# EAGLE board InkTime (EAGLE 9.7.0)
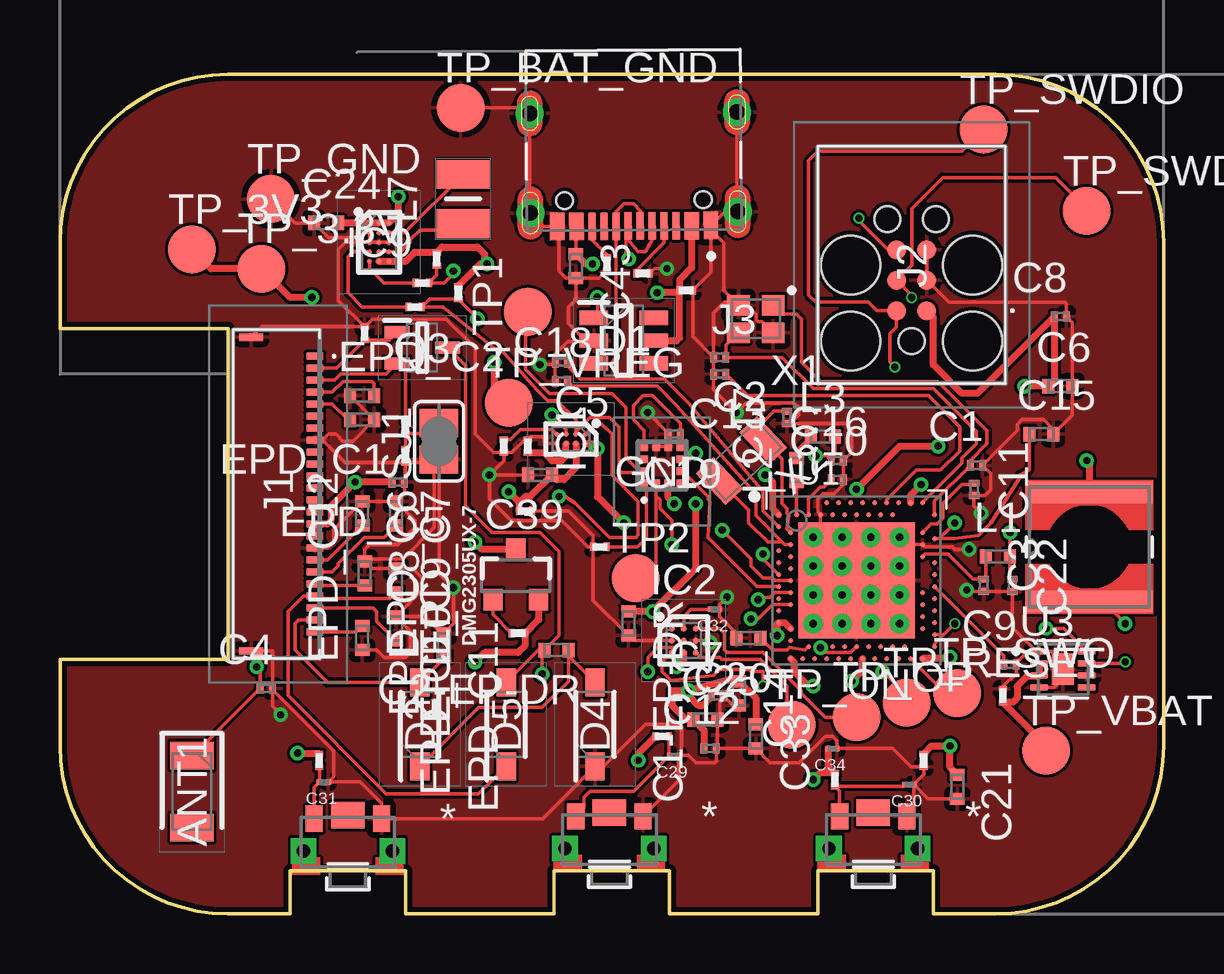
[diagram p0: board, top side]
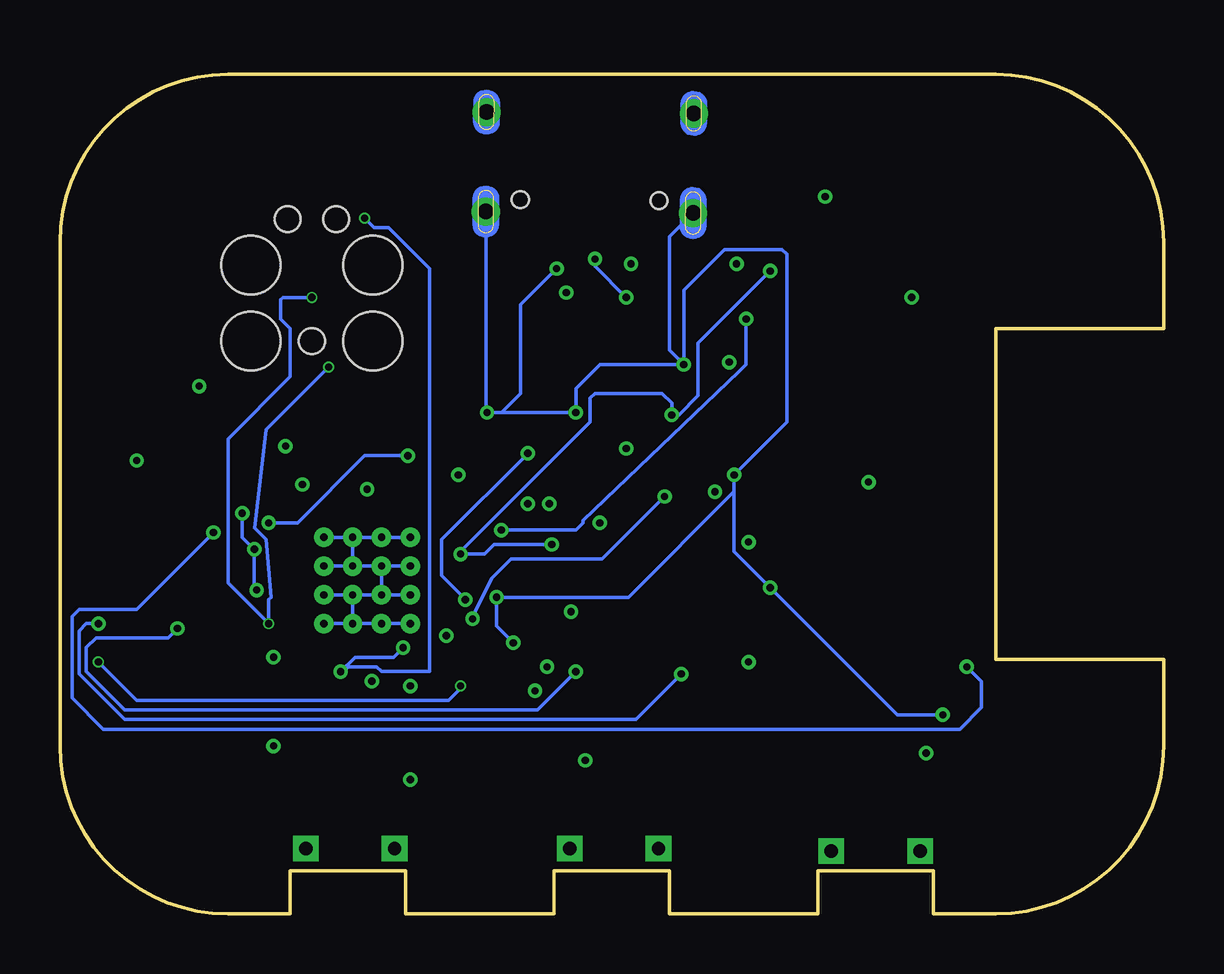
[diagram p1: board, bottom side, seen from below]

Size 46 x 35 mm. Coordinates in mm from the lower left corner, seen from the top.
Outline: 39,0 36.4,0 36.4,1.8 31.6,1.8 31.6,0 25.4,0 25.4,1.8 20.6,1.8 20.6,0 14.4,0 14.4,1.8 9.6,1.8 9.6,0 7,0 arc-90 0,7 0,10.6 7,10.6 7,24.4 0,24.4 0,28 arc-90 7,35 39,35 arc-90 46,28 46,7 arc-90 39,0
Copper layers (1+2*63+16): Top / GND / Bottom / layer 63
Stack-up 4 Layer Stack: Top SilkScreen Epoxy Ink / Top SolderMask User Defined 0.02mm Dk 4.3 / Top Surface Finish Lead-Free 0.02mm / Top User Defined 0.03mm / Dielectric-1 User Defined 0.034mm / Dielectric-2 User Defined 0.034mm / GND User Defined 0.03mm / Dielectric-3 User Defined 0.664mm / Power User Defined 0.03mm / Dielectric-4 User Defined 0.034mm / Dielectric-5 User Defined 0.034mm / Bottom User Defined 0.03mm / Bottom Surface Finish Lead-Free 0.02mm / Bottom SolderMask User Defined 0.02mm Dk 4.3 / Bottom SilkScreen Epoxy Ink
Design rules: minimum copper width 5mil, minimum drill size 0.2mm, copper clearance wire_polygon to wire_polygon 5mil, copper clearance wire_polygon to pad_smd 5mil, copper clearance wire_polygon to via 5mil, copper clearance pad_smd to pad_smd 5mil, copper clearance pad_smd to via 5mil, copper clearance via to via 5mil, copper clearance smd to pad (same net) 5mil, copper clearance smd to via (same net) 5mil, copper clearance smd to smd (same net) 5mil, dimension clearance 0.2mm, via restrict clearance 0mil, restrict clearance 0mil, drill distance 6mil, keepout clearance 0mil

## Footprints (pad centres in the part's own frame; a part is rotated, then mirrored left to right if it is on the bottom)
2450AT18B100E_ANTC3216X140N = smd 1.15 x 1.8: 1 -1.5,0; 2 1.5,0
NORDIC_NRF_3_RESC0201_L = smd 0.28 x 0.43: 1 -0.255,0; 2 0.255,0
NORDIC_NRF_3_RESC0402_L = smd 0.5 x 0.6: 1 -0.5,0; 2 0.5,0
GRM011R60J152KE01L_1_0201 = smd 0.35 x 0.25: 1 0,0.275; 2 0,-0.275
GRM011R60J152KE01L_2_CAPC0201X13N = smd 0.22 x 0.23: 1 -0.185,0; 2 0.185,0
ESP32_C6_LIBRARY_3_SOT95P280X145-6N = smd 1.2 x 0.6: 1 -1.25,0.95; 2 -1.25,0; 3 -1.25,-0.95; 4 1.25,-0.95; 5 1.25,0; 6 1.25,0.95
ESP32_C6_LIBRARY_5_SOD3716X135N = smd 1.15 x 0.8: 1 -1.75,0; 2 1.75,0
ESP32_C6_LIBRARY_4_ESP32_C6_LIBRARY_4_ESP32_C6_LIBRARY_4_ESP32_C6_LIBRARY_4_ESP32_WROVER_SPARKFUN-DISCRETESEMI_SOT23-3 = smd 0.8 x 0.9: 1 -0.95,-1; 2 0.95,-1; 3 0,1.1
BMA423_BMA423 = smd 0.3 x 0.35: 1 -0.75,-0.775; 2 -0.25,-0.775; 3 0.25,-0.775; 4 0.75,-0.775; 7 0.75,0.775; 8 0.25,0.775; 9 -0.25,0.775; 10 -0.75,0.775 | smd 0.35 x 0.3: 5 0.775,-0.25; 6 0.775,0.25; 11 -0.775,0.25; 12 -0.775,-0.25
BQ25180YBGR_BGA8C40P2X4_100X155X50 = smd 0.2 x 0.2: A1 -0.2,0.6; A2 0.2,0.6; B1 -0.2,0.2; B2 0.2,0.2; C1 -0.2,-0.2; C2 0.2,-0.2; D1 -0.2,-0.6; D2 0.2,-0.6
DRV2605YZFR_BGA9C50P3X3_144X144X62 = smd 0.25 x 0.25: A1 -0.5,0.5; A2 0,0.5; A3 0.5,0.5; B1 -0.5,0; B2 0,0; B3 0.5,0; C1 -0.5,-0.5; C2 0,-0.5; C3 0.5,-0.5
RT6160AWSC_BGA15C40P3X5_140X230X60 = smd 0.216 x 0.216: A1 -0.4,0.8; A2 0,0.8; A3 0.4,0.8; B1 -0.4,0.4; B2 0,0.4; B3 0.4,0.4; C1 -0.4,0; C2 0,0; C3 0.4,0; D1 -0.4,-0.4; D2 0,-0.4; D3 0.4,-0.4; E1 -0.4,-0.8; E2 0,-0.8; E3 0.4,-0.8
503480-2400_5034802400 = smd 0.3 x 0.7: 1 -5.75,1.525; 2 -5.25,1.525; 3 -4.75,1.525; 4 -4.25,1.525; 5 -3.75,1.525; 6 -3.25,1.525; 7 -2.75,1.525; 8 -2.25,1.525; 9 -1.75,1.525; 10 -1.25,1.525; 11 -0.75,1.525; 12 -0.25,1.525; 13 0.25,1.525; 14 0.75,1.525; 15 1.25,1.525; 16 1.75,1.525; 17 2.25,1.525; 18 2.75,1.525; 19 3.25,1.525; 20 3.75,1.525; 21 4.25,1.525; 22 4.75,1.525; 23 5.25,1.525; 24 5.75,1.525 | smd 0.3 x 1: MP1 -6.54,-1.125; MP2 6.54,-1.125
TC2030-IDC_TC2030IDC = smd 0.783 x 0.783: 1 -0.953,-0.635; 2 -0.953,0.635; 3 0.317,-0.635; 4 0.317,0.635; 5 1.588,-0.635; 6 1.588,0.635 | hole 2.451: -2.223,-2.54; -2.223,2.54; 0.952,-2.54; 0.952,2.54 | hole 1.067: -2.223,0; 2.857,-1.016; 2.857,1.016
KH-TYPE-C-16P_KINGHELM_KH-TYPE-C-16P = smd 0.6 x 1.15: A1_B12 -3.2,4.725; A4_B9 -2.4,4.725; A9_B4 2.4,4.725; A12_B1 3.2,4.725 | smd 0.3 x 1.15: A5 -1.25,4.725; A6 -0.25,4.725; A7 0.25,4.725; A8 1.25,4.725; B5 1.75,4.725; B6 0.75,4.725; B7 -0.75,4.725; B8 -1.75,4.725 | drill 0.65 pad 1.05: SH1 -4.32,0; SH2 4.32,0; SH3 -4.32,4.15; SH4 4.32,4.15 | hole 0.7: -2.89,3.65; 2.89,3.65
NORDIC_NRF_2_RESC0402_L = smd 0.5 x 0.6: 1 -0.5,0; 2 0.5,0
ESP32_C6_LIBRARY_2_IND_4828-WE-TPC_WRE = smd 0.9 x 5.3: 1 -2.286,0; 2 2.286,0
MLP2016SR47MT0S1_INDC2016X100N = smd 1.2 x 2.2: 1 -1.028,0; 2 1.028,0
ESP32_C6_LIBRARY_6_SOT65P210X110-3N = smd 1.05 x 0.5: 1 -1.05,0.65; 2 -1.05,-0.65; 3 1.05,0
CPF0201D7K68C1_0201 = smd 0.35 x 0.25: 1 0,0.275; 2 0,-0.275
ERA-1AEB3401C_0201 = smd 0.35 x 0.25: 1 0,0.275; 2 0,-0.275
ESP32_C6_LIBRARY_7_JUMPER_SJ = smd 1.168 x 1.6: 1 -0.762,0; 2 0.762,0
2025-10-22_07-23-44_LIBRARY_SW_EVP-AKE31A_PAN = smd 0.711 x 1.092: 1 -1.4,-0.972; 2 1.4,-0.972 | drill 0.559 pad 0.914 square: 3 -1.848,0.381; 4 1.848,0.381 | smd 1.397 x 1.092: 5 0,-1.124
HECTOR_WATCH_1_TP20R = smd 2 x 2: TP 0,0
NORDIC_NRF_4_AQFN50P700X700X85_HS-74N = smd 4.85 x 4.85: P$74 0,0 | drill 0.3 pad 0.6: P$75 -1.8,1.8; P$76 -0.6,1.8; P$77 0.6,1.8; P$78 1.8,1.8; P$79 -1.8,0.6; P$80 -0.6,0.6; P$81 0.6,0.6; P$82 1.8,0.6; P$83 -1.8,-0.6; P$84 -0.6,-0.6; P$85 0.6,-0.6; P$86 1.8,-0.6; P$87 -1.8,-1.8; P$88 -0.6,-1.8; P$89 0.6,-1.8; P$90 1.8,-1.8 | smd 0.2 x 0.2: P$A8 -1.25,3.25; P$A10 -0.75,3.25; P$A12 -0.25,3.25; P$A14 0.25,3.25; P$A16 0.75,3.25; P$A18 1.25,3.25; P$A20 1.75,3.25; P$A22 2.25,3.25; P$A23 2.75,3.25; P$AA24 3.25,-2.25; P$AB2 -2.75,-2.5; P$AC5 -2,-2.75; P$AC9 -1,-2.75; P$AC11 -0.5,-2.75; P$AC13 0,-2.75; P$AC15 0.5,-2.75; P$AC17 1,-2.75; P$AC19 1.5,-2.75; P$AC21 2,-2.75; P$AC24 3.25,-2.75; P$AD2 -2.75,-3.25; P$AD4 -2.25,-3.25; P$AD6 -1.75,-3.25; P$AD8 -1.25,-3.25; P$AD10 -0.75,-3.25; P$AD12 -0.25,-3.25; P$AD14 0.25,-3.25; P$AD16 0.75,-3.25; P$AD18 1.25,-3.25; P$AD20 1.75,-3.25; P$AD22 2.25,-3.25; P$AD23 2.75,-3.25; P$B1 -3.25,2.75; P$B3 -2.5,2.75; P$B5 -2,2.75; P$B7 -1.5,2.75; P$B9 -1,2.75; P$B11 -0.5,2.75; P$B13 0,2.75; P$B15 0.5,2.75; P$B17 1,2.75; P$B19 1.5,2.75; P$B24 3.25,2.75; P$C1 -3.25,2.25; P$D2 -2.75,2; P$D23 2.75,2; P$E24 3.25,1.75; P$F2 -2.75,1.5; P$F23 2.75,1.5; P$G1 -3.25,1.25; P$H2 -2.75,1; P$H23 2.75,1; P$J1 -3.25,0.75; P$J24 3.25,0.75; P$K2 -2.75,0.5; P$L1 -3.25,0.25; P$L24 3.25,0.25; P$M2 -2.75,0; P$N1 -3.25,-0.25; P$N24 3.25,-0.25; P$P2 -2.75,-0.5; P$P23 2.75,-0.5; P$R1 -3.25,-0.75; P$R24 3.25,-0.75; P$T2 -2.75,-1; P$T23 2.75,-1; P$U1 -3.25,-1.25; P$U24 3.25,-1.25; P$V23 2.75,-1.5; P$W1 -3.25,-1.75; P$W24 3.25,-1.75; P$Y2 -2.75,-2; P$Y23 2.75,-2
ESP32_C6_LIBRARY_SON50P200X200X80-9N = smd 0.76 x 0.27: 1 -0.985,0.75; 2 -0.985,0.25; 3 -0.985,-0.25; 4 -0.985,-0.75; 5 0.985,-0.75; 6 0.985,-0.25; 7 0.985,0.25; 8 0.985,0.75 | smd 0.9 x 1.3: 9 0,0
NORDIC_NRF_BT-XTAL_2016_N = smd 0.95 x 0.85: 1 -0.725,-0.575; 2 0.725,-0.575; 3 0.725,0.575; 4 -0.725,0.575
NORDIC_NRF_1_XTAL_3215_N = smd 1 x 1.8: 1 -1.25,0; 2 1.25,0

## Placement (x,y rotation side)
ANT1  2450AT18B100E_2450AT18B100E  [2450AT18B100E_ANTC3216X140N]  5.5,5.1 270 top
C1  12pF  [NORDIC_NRF_3_RESC0201_L]  38.2,18.7 0 top
C1-EP-DR  10uF  [NORDIC_NRF_3_RESC0402_L]  23.7,12.1 270 top
C2  12pF  [NORDIC_NRF_3_RESC0201_L]  27.5,23.2 180 top
C2-EP-DR  4.7uF/25V  [NORDIC_NRF_3_RESC0402_L]  20.7,11 180 top
C3  1pF  [NORDIC_NRF_3_RESC0201_L]  38.5,13.7 270 top
C4  1pF  [NORDIC_NRF_3_RESC0201_L]  8.6,9.4 0 top
C5  100nF  [NORDIC_NRF_3_RESC0201_L]  20.9,23 180 top
C6  4.7μF  [NORDIC_NRF_3_RESC0402_L]  41.7,22 0 top
C7  100nF  [NORDIC_NRF_3_RESC0201_L]  27.4,9.1 0 top
C8  100nF  [NORDIC_NRF_3_RESC0201_L]  41.7,24.9 0 top
C9  820pF  [NORDIC_NRF_3_RESC0201_L]  39.6,10.4 0 top
C10  N.C.  [NORDIC_NRF_3_RESC0201_L]  32.4,18.1 0 top
C11  100pF  [NORDIC_NRF_3_RESC0201_L]  38.1,17.7 270 top
C12  100nF  [NORDIC_NRF_3_RESC0201_L]  27.1,6.9 0 top
C13  N.C.  [NORDIC_NRF_3_RESC0201_L]  27.5,22.5 180 top
C14  4.7μF  [NORDIC_NRF_3_RESC0402_L]  28.3,9.2 270 top
C15  1.0μF  [NORDIC_NRF_3_RESC0402_L]  40.9,20 0 top
C16  47nF  [NORDIC_NRF_3_RESC0201_L]  32.4,18.9 0 top
C17  12pF  [NORDIC_NRF_3_RESC0201_L]  30.3,20.7 90 top
C18  12pF  [NORDIC_NRF_3_RESC0201_L]  20.9,22.2 0 top
C19  100nF  [NORDIC_NRF_3_RESC0201_L]  25.6,20 180 top
C20  4.7μF  [NORDIC_NRF_3_RESC0402_L]  28.7,11.5 180 top
C21  4.7μF  [NORDIC_NRF_3_RESC0402_L]  37.4,5.3 270 top
C22  N.C.  [NORDIC_NRF_3_RESC0201_L]  39.7,13.7 270 top
C23  0.1uF  [GRM011R60J152KE01L_1_0201]  19.4,16.8 90 top
C24  10uF  [NORDIC_NRF_3_RESC0402_L]  11.1,28.8 0 top
C25  22uF  [NORDIC_NRF_3_RESC0402_L]  26.9,8.1 0 top
C27  o.1uF  [GRM011R60J152KE01L_1_0201]  39.3,9.1 0 top
C29  1uF  [GRM011R60J152KE01L_2_CAPC0201X13N]  25.6,6.6 180 top
C30  1uF  [GRM011R60J152KE01L_2_CAPC0201X13N]  35.4,5.4 180 top
C31  1uF  [GRM011R60J152KE01L_2_CAPC0201X13N]  11,5.5 180 top
C32  1uF  [GRM011R60J152KE01L_2_CAPC0201X13N]  27.3,12.7 180 top
C33  22uF  [NORDIC_NRF_3_RESC0402_L]  29,7.4 270 top
C34  0.1uF  [GRM011R60J152KE01L_2_CAPC0201X13N]  32.2,6.9 180 top
C37  1uF  [GRM011R60J152KE01L_1_0201]  19.5,19.5 0 top
C38  1uF  [GRM011R60J152KE01L_1_0201]  36,6.4 180 top
C39  10uF  [NORDIC_NRF_3_RESC0402_L]  20,18.3 180 top
C42  0.1uF  [GRM011R60J152KE01L_1_0201]  26.1,26 90 top
C43  4.7uF  [NORDIC_NRF_3_RESC0402_L]  21.5,27 270 top
D1  USBLC6-2SC6Y  [ESP32_C6_LIBRARY_3_SOT95P280X145-6N]  23.5,23.9 0 top
D2  MBR0530  [ESP32_C6_LIBRARY_5_SOD3716X135N]  15,7.9 90 top
D4  MBR0530  [ESP32_C6_LIBRARY_5_SOD3716X135N]  22.3,7.9 90 top
D5  MBR0530  [ESP32_C6_LIBRARY_5_SOD3716X135N]  18.6,7.9 90 top
DMG2305UX-7  20V/4.2A/52mΩ/1.4W  [ESP32_C6_LIBRARY_4_ESP32_C6_LIBRARY_4_ESP32_C6_LIBRARY_4_ESP32_C6_LIBRARY_4_ESP32_WROVER_SPARKFUN-DISCRETESEMI_SOT23-3]  19,14.1 0 top
EPD_C1  1uF/50V  [NORDIC_NRF_3_RESC0402_L]  12.6,20.6 180 top
EPD_C2  1uF/50V  [NORDIC_NRF_3_RESC0402_L]  12.6,21.6 0 top
EPD_C5  0.1uF/50V  [NORDIC_NRF_3_RESC0201_L]  14.1,18 180 top
EPD_C6  1uF/50V  [NORDIC_NRF_3_RESC0402_L]  12.6,16.7 270 top
EPD_C7  1uF/50V  [NORDIC_NRF_3_RESC0402_L]  14,16.7 270 top
EPD_C8  1uF/50V  [NORDIC_NRF_3_RESC0402_L]  12.7,14.2 270 top
EPD_C9  1uF/50V  [NORDIC_NRF_3_RESC0402_L]  14,13.9 270 top
EPD_C10  1uF/50V  [NORDIC_NRF_3_RESC0402_L]  14,11.9 270 top
EPD_C11  1uF/50V  [NORDIC_NRF_3_RESC0402_L]  16,11.2 270 top
EPD_C12  1uF/50V  [NORDIC_NRF_3_RESC0402_L]  12.6,11.5 90 top
GND  BMA423  [BMA423_BMA423]  25.1,18.7 0 top
IC1  BQ25180YBGR_BQ25180YBGR  [BQ25180YBGR_BGA8C40P2X4_100X155X50]  21.3,19.8 270 top
IC2  DRV2605YZFR  [DRV2605YZFR_BGA9C50P3X3_144X144X62]  26,11.4 0 top
IC9  RT6160AWSC_RT6160AWSC  [RT6160AWSC_BGA15C40P3X5_140X230X60]  13.3,28 0 top
J1  503480-2400_503480-2400  [503480-2400_5034802400]  9.1,17.5 270 top
J2  TC2030-IDC_TC2030-IDC  [TC2030-IDC_TC2030IDC]  35.5,26.1 90 top
J3  KH-TYPE-C-16P_KH-TYPE-C-16P  [KH-TYPE-C-16P_KINGHELM_KH-TYPE-C-16P]  23.9,33.4 180.4 top
L1  3.9nH  [NORDIC_NRF_2_RESC0402_L]  39.1,14.9 0 top
L2  10μH  [NORDIC_NRF_2_RESC0402_L]  30.7,18.5 90 top
L3  15nH  [NORDIC_NRF_2_RESC0402_L]  31.8,19.9 0 top
L5  68uH  [ESP32_C6_LIBRARY_2_IND_4828-WE-TPC_WRE]  42.9,15.3 90 top
L7  FTC252012SR47MBCA  [MLP2016SR47MT0S1_INDC2016X100N]  16.8,29.8 270 top
Q3  SI1308EDL-T1-GE3  [ESP32_C6_LIBRARY_6_SOT65P210X110-3N]  15.1,23.6 0 top
R1_EP_DR  0.47  [CPF0201D7K68C1_0201]  14.4,20.3 180 top
R1_USB  5k1  [ERA-1AEB3401C_0201]  24.3,26.7 270 top
R2  0  [CPF0201D7K68C1_0201]  15.1,26.3 270 top
R2_EP_DR  10K  [CPF0201D7K68C1_0201]  12.7,24.2 0 top
R2_USB  5K1  [ERA-1AEB3401C_0201]  22.8,27.1 0 top
R3  0  [CPF0201D7K68C1_0201]  22.5,15.3 90 top
R4  0  [CPF0201D7K68C1_0201]  14.8,25.3 270 top
R5  10K  [ERA-1AEB3401C_0201]  32.3,5.6 180 top
R7  10K  [ERA-1AEB3401C_0201]  25.1,7.4 270 top
R8  10K  [ERA-1AEB3401C_0201]  10.8,6.4 180 top
R9  10K  [CPF0201D7K68C1_0201]  18.5,19.5 180 top
R17  3K3  [CPF0201D7K68C1_0201]  16.6,25.9 0 top
R18  3K3  [CPF0201D7K68C1_0201]  15.7,27.3 0 top
R_RWR_EPD  10K  [CPF0201D7K68C1_0201]  19.1,11.7 90 top
R_TYPE_SEL  2.2  [CPF0201D7K68C1_0201]  14.4,19.1 180 top
SJ1  [ESP32_C6_LIBRARY_7_JUMPER_SJ]  15.8,19.7 90 top
SW_DN  2025-10-22_07-23-44_LIBRARY_EVP-AKE31ASW_EVP-AKE31A_PAN  [2025-10-22_07-23-44_LIBRARY_SW_EVP-AKE31A_PAN]  22.9,3.1 180 top
SW_ENT  2025-10-22_07-23-44_LIBRARY_EVP-AKE31ASW_EVP-AKE31A_PAN  [2025-10-22_07-23-44_LIBRARY_SW_EVP-AKE31A_PAN]  12,3 180 top
SW_UP  2025-10-22_07-23-44_LIBRARY_EVP-AKE31ASW_EVP-AKE31A_PAN  [2025-10-22_07-23-44_LIBRARY_SW_EVP-AKE31A_PAN]  33.9,3.1 180 top
TP1  HECTOR_WATCH_1_TPTP20R  [HECTOR_WATCH_1_TP20R]  19.5,25.1 90 top
TP2  HECTOR_WATCH_1_TPTP20R  [HECTOR_WATCH_1_TP20R]  24,14 0 top
TP_3.3V  HECTOR_WATCH_1_TPTP20R  [HECTOR_WATCH_1_TP20R]  8.4,26.9 0 top
TP_3V3  HECTOR_WATCH_1_TPTP20R  [HECTOR_WATCH_1_TP20R]  5.5,27.7 0 top
TP_BAT_GND  HECTOR_WATCH_1_TPTP20R  [HECTOR_WATCH_1_TP20R]  16.7,33.6 0 top
TP_GND  HECTOR_WATCH_1_TPTP20R  [HECTOR_WATCH_1_TP20R]  8.8,29.8 0 top
TP_ON  HECTOR_WATCH_1_TPTP20R  [HECTOR_WATCH_1_TP20R]  30.5,7.9 0 top
TP_OP  HECTOR_WATCH_1_TPTP20R  [HECTOR_WATCH_1_TP20R]  33.2,8.2 0 top
TP_RESET  HECTOR_WATCH_1_TPTP20R  [HECTOR_WATCH_1_TP20R]  35.3,8.8 0 top
TP_SWDCLK  HECTOR_WATCH_1_TPTP20R  [HECTOR_WATCH_1_TP20R]  42.8,29.3 0 top
TP_SWDIO  HECTOR_WATCH_1_TPTP20R  [HECTOR_WATCH_1_TP20R]  38.5,32.7 0 top
TP_SWO  HECTOR_WATCH_1_TPTP20R  [HECTOR_WATCH_1_TP20R]  37.4,9.2 0 top
TP_VBAT  HECTOR_WATCH_1_TPTP20R  [HECTOR_WATCH_1_TP20R]  41.1,6.8 0 top
TP_VREG  HECTOR_WATCH_1_TPTP20R  [HECTOR_WATCH_1_TP20R]  18.7,21.3 0 top
U1  NORDIC_NRF_4_NRF52840_QF  [NORDIC_NRF_4_AQFN50P700X700X85_HS-74N]  33.2,13.9 0 top
U3  MAX17048G+T10  [ESP32_C6_LIBRARY_SON50P200X200X80-9N]  41.8,10.2 0 top
X1  32MHz  [NORDIC_NRF_BT-XTAL_2016_N]  29,24.8 180 top
X2  [NORDIC_NRF_1_XTAL_3215_N]  28.4,18.9 223.2 top

## Library data of the parts
ANT1 = InkTime_v5; ARROW_PART_NUMBER: 2450AT18B100E; ARROW_PRICE-STOCK: https://www.arrow.com/en/products/2450at18b100e/johanson-dielectrics?utm_currency=USD&region=nac; DESCRIPTION: Antennas 2.45GHz ANTENNA; HEIGHT: 1.4mm; MANUFACTURER_NAME: JOHANSON TECHNOLOGY; MANUFACTURER_PART_NUMBER: 2450AT18B100E; MOUSER_PART_NUMBER: 609-2450AT18B100E; MOUSER_PRICE-STOCK: https://www.mouser.co.uk/ProductDetail/Johanson-Technology/2450AT18B100E?qs=yCnrNFeXz%252Bh5MFsFIXGZGA%3D%3D
C1 C1-EP-DR C2 C2-EP-DR C3-C25 C27 C33 C37-C39 C42 C43 EPD_C1 EPD_C2 EPD_C5-EPD_C12 L1-L3 R1_EP_DR R1_USB R2 R2_EP_DR R2_USB R3-R5 R7-R9 R17 R18 R_RWR_EPD R_TYPE_SEL SJ1 TP1 TP2 TP_3.3V TP_3V3 TP_BAT_GND TP_GND TP_ON TP_OP TP_RESET TP_SWDCLK TP_SWDIO TP_SWO TP_VBAT TP_VREG U1 X1 X2 = InkTime_v5
C29-C32 C34 = InkTime_v5; AVAILABILITY: In Stock; CHECK_PRICES: https://www.snapeda.com/parts/GRM011R60J152KE01L/Murata/view-part/?ref=eda; DESCRIPTION: SMD Capacitor X5R(EIA) with Capacitance: 1500pF Tol. 10%. Rated Voltage: 6.3Vdc; MF: Murata; MP: GRM011R60J152KE01L; PACKAGE: 0201 Murata; PRICE: None; SNAPEDA_LINK: https://www.snapeda.com/parts/GRM011R60J152KE01L/Murata/view-part/?ref=snap
D1 = InkTime_v5; AVAILABILITY: In Stock; CHECK_PRICES: https://www.snapeda.com/parts/USBLC6-2SC6Y/STMicroelectronics/view-part/?ref=eda; DESCRIPTION: 17V Clamp 5A (8/20µs) Ipp Tvs Diode Surface Mount SOT-23-6; MF: STMicroelectronics; MP: USBLC6-2SC6Y; PACKAGE: SOT-23-6 STMicroelectronics; PRICE: None; SNAPEDA_LINK: https://www.snapeda.com/parts/USBLC6-2SC6Y/STMicroelectronics/view-part/?ref=snap
D2 D4 D5 = InkTime_v5; AVAILABILITY: In Stock; CHECK_PRICES: https://www.snapeda.com/parts/MBR0530/Onsemi/view-part/?ref=eda; DESCRIPTION: Diode Schottky 30 V 500mA Surface Mount SOD-123; MF: ON Semiconductor; MP: MBR0530; PACKAGE: SOD-123-2 ON Semiconductor; PRICE: None; PURCHASE-URL: https://www.snapeda.com/api/url_track_click_mouser/?unipart_id=179458&manufacturer=ON Semiconductor&part_name=MBR0530&search_term=None; SNAPEDA_LINK: https://www.snapeda.com/parts/MBR0530/Onsemi/view-part/?ref=snap
DMG2305UX-7 = InkTime_v5; PROD_ID: TRAN-14388
GND = InkTime_v5; ARROW_PART_NUMBER: BMA423; ARROW_PRICE-STOCK: https://www.arrow.com/en/products/bma423/bosch; DESCRIPTION: Accelerometers Triaxial low-g 12bit Acceleration Sensor; HEIGHT: 1mm; MANUFACTURER_NAME: BOSCH; MANUFACTURER_PART_NUMBER: BMA423; MOUSER_PART_NUMBER: 262-BMA423; MOUSER_PRICE-STOCK: https://www.mouser.co.uk/ProductDetail/Bosch-Sensortec/BMA423?qs=HXFqYaX1Q2xC%252BSgeGoX3mg%3D%3D
IC1 = InkTime_v5; ARROW_PART_NUMBER: BQ25180YBGR; ARROW_PRICE-STOCK: https://www.arrow.com/en/products/bq25180ybgr/texas-instruments?utm_currency=USD&region=nac; DESCRIPTION: Charger IC Lithium Ion/Polymer, Lithium Iron Phosphate 8-DSBGA (1.6x1.1); HEIGHT: 0.5mm; MANUFACTURER_NAME: Texas Instruments; MANUFACTURER_PART_NUMBER: BQ25180YBGR; MOUSER_PART_NUMBER: 595-BQ25180YBGR; MOUSER_PRICE-STOCK: https://www.mouser.co.uk/ProductDetail/Texas-Instruments/BQ25180YBGR?qs=doiCPypUmgEWjAK%252BJAX6Tw%3D%3D
IC2 = InkTime_v5; ARROW_PART_NUMBER: DRV2605YZFR; ARROW_PRICE-STOCK: https://www.arrow.com/en/products/drv2605yzfr/texas-instruments?region=nac; DESCRIPTION: Haptic Driver for ERM/LRA with Built-In Library and Smart Loop Architecture; HEIGHT: 0.625mm; MANUFACTURER_NAME: Texas Instruments; MANUFACTURER_PART_NUMBER: DRV2605YZFR
IC9 = InkTime_v5; DESCRIPTION: Buck-Boost Regulator Positive Output Step-Up/Step-Down I2C DC-DC Controller IC 15-WL-CSP (BSC) (1.4x2.3); HEIGHT: 0.6mm; MANUFACTURER_NAME: RICHTEK; MANUFACTURER_PART_NUMBER: RT6160AWSC; MOUSER_PART_NUMBER: 835-RT6160AWSC; MOUSER_PRICE-STOCK: https://www.mouser.co.uk/ProductDetail/Richtek/RT6160AWSC?qs=amGC7iS6iy%2FLd9PSoixZXQ%3D%3D
J1 = InkTime_v5; DESCRIPTION: FFC & FPC Connectors 0.5mm FPC RA SMT Dual Contact 24Ckt; HEIGHT: 1.87mm; MANUFACTURER_NAME: Molex; MANUFACTURER_PART_NUMBER: 503480-2400; MOUSER_PART_NUMBER: 538-503480-2400; MOUSER_PRICE-STOCK: https://www.mouser.co.uk/ProductDetail/Molex/503480-2400?qs=OAhjpuo3Vu7efIoxFh9AOw%3D%3D
J2 = InkTime_v5; DESCRIPTION: CABLE ADAPTER 6 POS; HEIGHT: 19mm; MANUFACTURER_NAME: Tag Connect; MANUFACTURER_PART_NUMBER: TC2030-IDC
J3 = InkTime_v5; AVAILABILITY: Not in stock; CHECK_PRICES: https://www.snapeda.com/parts/KH-TYPE-C-16P/Kinghelm/view-part/?ref=eda; MF: kinghelm; MP: KH-TYPE-C-16P; PACKAGE: None; PRICE: None; SNAPEDA_LINK: https://www.snapeda.com/parts/KH-TYPE-C-16P/Kinghelm/view-part/?ref=snap
L5 = InkTime_v5; COPYRIGHT: Copyright (C) 2024 Ultra Librarian. All rights reserved.; MANUFACTURER_PART_NUMBER: 744043680; MFR_NAME: Wurth Electronics
L7 = InkTime_v5; DESCRIPTION: SMD / SMT Inductors (Coils), L=0.47?H, L x W x T :; HEIGHT: 1mm; JLCPCB: https://jlcpcb.com/partdetail/6763488-FTC252012SR47MBCA/C5832368; MANUFACTURER_NAME: TDK; MANUFACTURER_PART_NUMBER: FTC252012SR47MBCA
Q3 = InkTime_v5; AVAILABILITY: In Stock; CHECK_PRICES: https://www.snapeda.com/parts/SI1308EDL-T1-GE3/Vishay+Siliconix/view-part/?ref=eda; DESCRIPTION: Si1308EDL-T1-GE3 N-channel MOSFET Transistor, 1.5 A, 30 V, 3-Pin SC-70 | Siliconix / Vishay SI1308EDL-T1-GE3; MF: Vishay Siliconix; MP: SI1308EDL-T1-GE3; PACKAGE: SOT-323 Vishay Semiconductor; PRICE: None; PURCHASE-URL: https://www.snapeda.com/api/url_track_click_mouser/?unipart_id=274603&manufacturer=Vishay Siliconix&part_name=SI1308EDL-T1-GE3&search_term=None; SNAPEDA_LINK: https://www.snapeda.com/parts/SI1308EDL-T1-GE3/Vishay+Siliconix/view-part/?ref=snap
SW_DN SW_ENT SW_UP = InkTime_v5; COPYRIGHT: Copyright (C) 2025 Ultra Librarian. All rights reserved.; DIGI-KEY_PART_NUMBER_1: P123437TR-ND; DIGI-KEY_PART_NUMBER_2: P123437CT-ND; DIGI-KEY_PART_NUMBER_3: P123437DKR-ND; MANUFACTURER_NAME: Panasonic; MANUFACTURER_PART_NUMBER: EVP-AKE31A
U3 = InkTime_v5; AVAILABILITY: In Stock; CHECK_PRICES: https://www.snapeda.com/parts/MAX17048G+T10/Analog+Devices/view-part/?ref=eda; DESCRIPTION: 3µA 1-Cell/2-Cell Fuel Gauge with ModelGauge; MF: Analog Devices; MP: MAX17048G+T10; PACKAGE: TDFN-8 Maxim; PRICE: None; PURCHASE-URL: https://www.snapeda.com/api/url_track_click_mouser/?unipart_id=329239&manufacturer=Analog Devices&part_name=MAX17048G+T10&search_term=None; SNAPEDA_LINK: https://www.snapeda.com/parts/MAX17048G+T10/Analog+Devices/view-part/?ref=snap

## Nets
3V3/1.7D: C34.2 DMG2305UX-7.2 IC2.C2 R5.2 R7.2 R8.2 R_RWR_EPD.2
3V3/2.4A: C6.1 C7.1 C8.1 C12.1 C14.1 C25.1 C33.1 GND.3 IC9.E2 IC9.E3 J2.1 R17.1 R18.1 TP_3.3V.TP TP_3V3.TP U1.P$A22 U1.P$AD14 U1.P$AD23 U1.P$B1 U1.P$W1 U1.P$Y2
ALERT/1.6C: U3.5
ALERT/2.5C: U1.P$J24
D+/1.5D: D1.4
D+/2.7D: U1.P$AD6
D-/1.5D: D1.6
D-/2.7D: U1.P$AD4
DEC1: C5.1 U1.P$C1
DN: D1.1 J3.A7 J3.B7
DP: D1.3 J3.A6 J3.B6
EPD_3V3: C1-EP-DR.1 DMG2305UX-7.3 EPD_C5.2 J1.15 J1.16 L5.2
EPD_BUSY/1.5D: J1.9
EPD_BUSY/2.2D: U1.P$AD12
EPD_CS/1.4C: J1.12
EPD_CS/2.2D: U1.P$K2
EPD_DC/1.5D: J1.11
EPD_DC/2.2D: U1.P$AD10
EPD_RST/1.5D: J1.10
EPD_RST/2.2D: U1.P$AC11
GDR: J1.2 Q3.1 R2_EP_DR.2
GND: C1-EP-DR.2 C1.2 C2.2 C3.2 C4.2 C5.2 C6.2 C7.2 C8.2 C9.2 C10.2 C11.2 C12.2 C13.2 C14.2 C15.2 C16.2 C17.1 C18.1 C19.2 C20.2 C21.2 C22.2 C23.2 C24.1 C25.2 C27.1 C29.1 C30.1 C31.1 C32.1 C33.2 C34.1 C37.1 C38.1 C39.2 C42.2 C43.2 D1.2 D4.1 EPD_C1.1 EPD_C2.1 EPD_C5.1 EPD_C6.1 EPD_C7.1 EPD_C8.1 EPD_C9.1 EPD_C10.1 EPD_C11.1 EPD_C12.1 GND.8 GND.9 IC1.D2 IC2.B1 IC2.B3 IC9.B1 IC9.C1 IC9.C2 IC9.C3 J1.8 J1.17 J1.MP1 J1.MP2 J2.3 J2.5 J3.A1_B12 J3.A12_B1 J3.SH1 J3.SH2 J3.SH3 J3.SH4 R1_USB.1 R2_EP_DR.1 R2_USB.2 R3.1 R9.1 R_TYPE_SEL.1 SJ1.1 SW_DN.1 SW_ENT.1 SW_UP.1 TP_BAT_GND.TP TP_GND.TP U1.P$74 U1.P$75 U1.P$76 U1.P$77 U1.P$78 U1.P$79 U1.P$80 U1.P$81 U1.P$82 U1.P$83 U1.P$84 U1.P$85 U1.P$86 U1.P$87 U1.P$88 U1.P$89 U1.P$90 U1.P$B7 U1.P$F23 U3.1 U3.4 U3.6 U3.9 X1.2 X1.4
HAPTIC_EN/1.4C: IC2.A1
HAPTIC_EN/2.6A: U1.P$U1
IMU_INT1: GND.5 U1.P$N1
IMU_INT2: GND.6 U1.P$P2
LX1: IC9.B2 IC9.B3 L7.1
LX2: IC9.D2 IC9.D3 L7.2
MOSI/1.5B: J1.14
MOSI/2.2D: U1.P$B13
N$1: C17.2 U1.P$D2 X2.1
N$2: C18.2 U1.P$F2 X2.2
N$4: L2.2 L3.1
N$5: L2.1 U1.P$B3
N$6: C10.1 C15.1 C16.1 L3.2 U1.P$B5 U1.P$E24
N$7: C13.1 U1.P$A18
N$8: C11.1 U1.P$D23
N$9: C1.1 U1.P$B24 X1.1
N$11: C2.1 U1.P$A23 X1.3
N$12: C9.1 U1.P$N24
N$13: IC1.D1 R9.2
N$14: C3.1 L1.1 U1.P$H23
N$15: ANT1.1 C4.1 C22.1 L1.2
N$16: C20.1 U1.P$AC5
N$20: C19.1 GND.7 GND.10
N$21: GND.1 R3.2
N$22: R1_EP_DR.1 R_TYPE_SEL.2 SJ1.2
N$23: IC9.E1 R2.2
N$24: J3.B5 R2_USB.1
N$26: IC9.D1 R4.2
N$28: C2-EP-DR.2 D5.2 L5.1 Q3.3
N$29: C2-EP-DR.1 D2.1 D4.2
N$30: C32.2 IC2.A2
N$31: EPD_C2.2 J1.4
N$32: EPD_C1.2 J1.5
N$34: EPD_C6.2 J1.18
N$35: EPD_C7.2 J1.19
N$36: EPD_C8.2 J1.20
N$37: J3.A5 R1_USB.2
N$38: EPD_C10.2 J1.22
N$40: EPD_C12.2 J1.24
OUT+: IC2.A3 TP_OP.TP
OUT-: IC2.C3 TP_ON.TP
P0.04: U1.P$J1
P0.09: U1.P$L24
P0.13/1.5D: C30.2 R5.1 SW_UP.2
P0.13/2.6C: U1.P$AD8
P0.14/1.5D: C31.2 R8.1 SW_ENT.2
P0.14/2.7C: U1.P$AC9
P0.19: U1.P$AC15
P0.20: U1.P$AD16
P0.21: U1.P$AC17
P0.22: U1.P$AD18
P0.23: U1.P$AC19
P0.24: U1.P$AD20
P0.25: U1.P$AC21
P0.26: U1.P$G1
P0.27: U1.P$H2
P0.28: U1.P$B11
P0.29: U1.P$A10
P0.30: U1.P$B9
P0.31: U1.P$A8
P1.01/1.6C: DMG2305UX-7.1 R_RWR_EPD.1
P1.01/2.4B: U1.P$Y23
P1.02/1.6C: C29.2 R7.1 SW_DN.2
P1.02/2.8C: U1.P$W24
P1.03: U1.P$V23
P1.04: U1.P$U24
P1.05: U1.P$T23
P1.06: U1.P$R24
P1.07: U1.P$P23
P1.09: U1.P$R1
P1.10: U1.P$A20
P1.11: U1.P$B19
P1.12: U1.P$B17
P1.13: U1.P$A16
P1.14: U1.P$B15
P1.15: U1.P$A14
PMIC_INT: IC1.A1 U1.P$T2
PREVGH: D5.1 EPD_C9.2 J1.21
PREVGL: D2.2 EPD_C11.2 J1.23
RESE: J1.3 Q3.2 R1_EP_DR.2
RESET: J2.6 TP_RESET.TP U1.P$AC13
SCK/1.5B: J1.13
SCK/2.2D: U1.P$A12
SCL/1.4C: IC2.C1 U3.7
SCL/2.4C: GND.12 IC1.B1 R4.1 R17.2 TP1.TP U1.P$M2
SDA/1.4C: IC2.B2 U3.8
SDA/2.4C: GND.2 IC1.C1 R2.1 R18.2 TP2.TP U1.P$L1
SWDCLK: J2.2 J2.4 TP_SWDCLK.TP TP_SWDIO.TP U1.P$AA24 U1.P$AC24
SWO: TP_SWO.TP U1.P$AD22
VBAT/1.2A: C27.2 TP_VBAT.TP U3.2 U3.3
VBAT/2.5C: C37.2 IC1.C2
VBUS/1.5D: C42.1 C43.1 D1.5 J3.A4_B9 J3.A9_B4
VBUS/2.6D: C21.1 C38.2 IC1.A2 U1.P$AD2
VREG: C23.1 C24.2 C39.1 IC1.B2 IC9.A1 IC9.A2 IC9.A3 TP_VREG.TP

## Tracks (layer width: path | path; a pad name or v marks a point on that pad's centre or on a via)
3V3/1.7D  (via drill 0.3 pad 0.6)
  Top 0.3: C34.2 32.02,6.16 R5.2 31.68,5.88 v31.4,5.6 | DMG2305UX-7.2 19.95,12.28 R_RWR_EPD.2 19.38,11.18 19.1,10.9 17.7,10.9 v17.3,10.5 | R7.2 24.1,6.68 v24.1,6.4 | R8.2 9.93,6.68 v9.9,6.7 | v25.7,10.3 26,10.6 IC2.C2
  Power 0.3: v31.4,5.6 24.9,5.6 v24.1,6.4 23.7,6.8 23.7,7.7 25.7,9.7 v25.7,10.3 25.4,10.3 24.6,11.1 24.2,11.1 22.2,9.1 18.7,9.1 v17.3,10.5 13.7,10.5 v9.9,6.7
3V3/2.4A  (via drill 0.3 pad 0.6)
  Top 0.3: v40.2,22 C6.1 41.45,22.25 C8.1 38.24,21.7 37.6,21.7 36.4,22.9 36.4,24.88 J2.1 | v35.9,17.9 35.45,17.45 U1.P$A22 | v29.4,18.3 29.7,18 29.7,16.9 U1.P$B1 | v25.6,17.1 25.35,17.35 GND.3 | R17.1 17.52,27.1 17.7,27.1 | 17.7,27.1 v17.8,27.1 | 17.7,27.1 17.7,27.5 17.4,27.8 15.93,27.8 R18.1 14.78,27.57 14.4,27.2 IC9.E3 IC9.E2 | v26.2,9.3 27.91,9.75 28.25,9.75 C14.1 29,9 C33.1 | v26.2,9.3 25.5,9.3 25.5,8.7 26.1,8.1 C25.1 26.84,7.65 C12.1 | v26.2,9.3 26.2,9.1 26.6,8.7 26.8,8.7 27.14,9.04 C7.1 | v10.5,25.7 9.6,25.7 TP_3.3V.TP 6.3,26.9 TP_3V3.TP | v29.9,11.6 29.9,12.1 U1.P$W1 30.2,12.15 U1.P$Y2 | v33,9.7 33.45,10.15 U1.P$AD14 | v37.1,10.7 37.05,10.65 U1.P$AD23
  Power 0.3: v40.2,22 38.2,22 35.9,19.7 v35.9,17.9 35.4,18.4 29.5,18.4 v29.4,18.3 26.8,18.3 v25.6,17.1 | v10.5,25.7 10.6,25.8 10.6,27.8 13.7,30.9 15,30.9 17.9,28 17.9,27.2 v17.8,27.1 23.6,21.3 23.6,18 24.5,17.1 v25.6,17.1 | v25.6,17.1 27,15.7 27,13.1 28.8,11.3 29.6,11.3 v29.9,11.6 30.3,11.6 32.2,9.7 v33,9.7 33.6,9.7 33.9,9.4 35.8,9.4 v37.1,10.7 | v26.2,9.3 26.3,9.4 26.3,9.9 26.6,10.2 26.28,12.2 26,12.2 24.8,13.5 24.5,13.8 24.2,13.8 22.8,15.2 22.8,16.7 23.1,17 23.9,17 24.6,16.3 24.8,16.3 v25.6,17.1
DEC1
  Top 0.152: C5.1 21.16,22.84 21.7,22.3 25.2,22.3 26.2,21.3 29.3,17.6 29.3,16.8 U1.P$C1
DN  (via drill 0.3 pad 0.6)
  Top 0.152: v23.7,27.3 23.6,27.4 23.6,28.59 J3.A7 23.68,28.12 24.1,27.6 24.4,27.6 24.68,28.08 J3.B7 | v22.4,25.7 22.4,25 D1.1
  Bottom 0.15: v23.7,27.3 23.7,27 v22.4,25.7
DP
  Top 0.152: D1.3 22.95,22.95 23.18,23.18 J3.B6 23.18,29.28 23.5,29.6 23.9,29.6 24.2,29.3 24.2,28.69 J3.A6
EPD_3V3  (via drill 0.3 pad 0.6)
  Top 0.3: C1-EP-DR.1 v24.7,12.6 26.5,14.4 v26.5,17.1 | DMG2305UX-7.3 17.6,15.2 v17.3,15.5 | EPD_C5.2 v12.3,18 11.3,17 11.3,16.4 11.15,16.25 J1.15 J1.16 | v42.8,18.9 42.9,18.8 L5.2 | v33.2,17.7 35,19.5 v36.6,19.5
  Power 0.3: v12.3,18 14.8,15.5 v17.3,15.5 17.1,15.3 17.1,14 19.7,11.4 23.5,11.4 v24.7,12.6 | v26.5,17.1 32.6,17.1 v33.2,17.7 | v36.6,19.5 42.2,19.5 v42.8,18.9
GDR
  Top 0.152: Q3.1 13.72,23.93 R2_EP_DR.2 11.53,22.75 J1.2
GND  (via drill 0.3 pad 0.6)
  Top 0.15: EPD_C8.1 13,14.4 EPD_C9.1 14.7,14.4 15.1,14 15.1,13.5 EPD_C10.1 14.1,12.3 | EPD_C8.1 12.8,14.7 12.9,14.8 14.3,14.8 15.6,16.1 15.6,18.82 | C4.2 8.86,10.96 J1.MP2 | SW_ENT.1 13.4,4.6 12.5,5.5 C31.1 11.4,5.71 11.4,6.8 8.86,9.35 C4.2 | IC2.B1 23.9,11.4 C1-EP-DR.2 22.23,13.07 R3.1 | 14.1,12.3 14.6,11.8 14.6,10.9 14.4,10.7 13.5,10.7 13.2,11 EPD_C12.1 | 14.1,12.3 14.2,12.4 15.2,12.4 15.9,11.7 EPD_C11.1 16.4,12.1 v16.4,13.6 | v9.2,8.3 8.86,8.64 C4.2 | 31.6,17.3 31.6,16.75 U1.P$B7 31.7,16 U1.P$75 | EPD_C2.1 EPD_C1.1 12.2,19.7 11.8,19.7 11.5,20 11.2,20 10.95,19.75 | EPD_C8.1 12.7,15.2 12.9,15.4 14.1,15.4 14.8,16.1 14.8,16.4 EPD_C7.1 | IC2.B3 27,11.4 v27.1,11.3 | R1_USB.1 24.77,26.9 v25.3,26.9 | U1.P$74 U1.P$85
  Top 0.152: TP_GND.TP 9.8,28.8 C24.1 11.2,28.2 12.3,28.2 12.5,28.4 IC9.B1 IC9.C1 | TP_BAT_GND.TP 19.35,33.6 J3.SH2 19.58,29.25 J3.SH4 20.18,28.65 J3.A12_B1 20.8,28.59 20.8,26.8 21.1,26.5 C43.2 | R2_USB.2 22.48,26.5 C43.2 | R2_EP_DR.1 8.41,24.48 J1.MP1 | R_TYPE_SEL.1 15.6,18.82 15.78,18.82 15.8,18.8 SJ1.1 15.8,14.2 v16.4,13.6 | R_TYPE_SEL.1 14.4,18.05 EPD_C5.1 14.36,17.55 EPD_C7.1 EPD_C6.1 11.4,16 11.4,15.5 11.15,15.25 J1.17 | C43.2 21.5,25.6 21.2,25.3 21.2,24.6 21.9,23.9 22,23.9 | 22,23.9 D1.2 | C5.2 C18.1 | 22,23.9 22,23.86 21.16,23.86 20.64,23.34 C5.2 | R2_EP_DR.1 11.6,25.57 11.6,27.7 11.9,28 IC9.C1 | C2.2 C13.2 27.25,21.86 v28.2,20.9 28.6,21.3 30.6,21.3 30.8,21.1 30.8,20.8 30.45,20.45 C17.1 32.76,20.45 33,20.2 33,19.25 C16.2 C10.2 32.66,17.9 32.26,17.5 31.8,17.5 31.6,17.3 | C2.2 27.25,25.05 27.7,25.5 28.15,25.5 | 28.15,25.5 X1.2 28.62,25.38 29,25 29,24.8 29.1,24.7 29.25,24.7 X1.4 | 27.65,26 27.68,25.98 | 27.68,25.98 28.15,25.5 | 27.13,28.5 J3.A1_B12 27.72,29.28 J3.SH3 28.22,29.31 J3.SH1 | 27.13,28.5 27.13,26.76 C42.2 26.38,24.07 C2.2 | C12.2 27.3,6.96 27.4,7.05 C25.2 27.5,8.2 27.5,8.95 C7.2 27.98,8.78 | 24.57,3.8 SW_DN.1 25.79,5.56 C29.1 | 28.1,8.65 27.98,8.78 | R_TYPE_SEL.1 11.88,18.82 10.95,19.75 J1.8 | 40.7,10.95 U3.1 41.45,10.95 41.8,10.6 U3.9 | 40.7,10.95 40.35,10.95 39.86,10.46 C9.2 39.86,10.03 39.3,9.47 C27.1 | 42.84,10 U3.6 42.05,9.95 U3.9 | C30.1 35.59,4.36 SW_UP.1 | C23.2 21.2,16.8 22.23,15.78 R3.1 22,15.3 20.9,16.4 18.8,16.4 17.9,17.3 v17.9,18.3 | 40.7,10.95 39.7,11.95 C22.2 C3.2 37.86,13.45 v37.8,13.5 | C21.2 36.19,4.8 C30.1 | C30.1 36,5.81 C38.1 35.48,6.12 34.7,6.9 C34.1 32.38,7.21 32.2,7.4 31.9,7.4 30.8,6.3 29.6,6.3 C33.2 C12.2
  Top 0.152: U3.4 41.45,9.45 41.8,9.8 U3.9 | J2.5 J2.3 37.05,25.5 41.9,25.5 41.95,25.45 C8.2 42.2,24.66 C6.2 42.2,20.8 C15.2 41.4,20.2 41,20.6 40.1,20.6 39.9,20.4 39.9,20.14 C1.2 38.8,18.36 38.8,17.7 38.55,17.45 C11.2 38.1,17 v38.4,16.7 | C12.2 27.36,6.36 27.3,6.3 26.5,6.3 26.2,6.6 C29.1 | C29.1 25.9,6.71 25.9,7.8 25.8,7.9 24.4,7.9 22.65,6.15 D4.1 20.12,3.97 SW_ENT.1 | C20.2 28.2,11.68 27.48,12.4 C32.1 27.48,12.88 v27.8,13.2 | v24.5,20.9 25.34,20.05 C19.2 GND.8 GND.9 | R2_EP_DR.1 13.03,24.8 16.1,24.8 17.3,23.6 17.3,20 18.07,19.23 R9.1 | v37.9,15.2 37.3,15.2 37.2,15.3 36.05,15.3 U1.P$F23 35.3,15.4 U1.P$78 | C5.2 20.55,22.9 v20,22.9 | R9.1 18.5,18.9 v17.9,18.3 | C39.2 v17.9,18.3 | R9.1 18.82,19.23 19.38,19.77 C37.1 19.62,19.9 20.1,19.9 20.2,19.8 20.2,19.7 20.3,19.6 IC1.D2 | IC9.C1 IC9.C2 IC9.C3 | 27.68,25.98 27.68,27.96 27.13,28.5 | 27.98,8.78 28.22,8.78 C14.2
  Bottom 0.15: v9.2,8.3 11.1,8.3 v16.4,13.6 17.9,15.1 v17.9,18.3 | v20,22.9 23.5,22.9 24.5,21.9 v24.5,20.9 | v17.9,18.3 17.9,17.6 22.3,13.2 v27.8,13.2 | v17.9,18.3 15.7,20.5 15.7,27.5 15.9,27.7 18.3,27.7 20,26 v20,22.9 | J3.SH4 20.6,28.23 20.6,23.5 v20,22.9 | J3.SH3 28.25,21.05 28.1,20.9 | U1.P$75 U1.P$76 U1.P$77 | U1.P$77 U1.P$78 | U1.P$79 U1.P$80 | U1.P$80 U1.P$81 | U1.P$81 U1.P$82 | U1.P$77 U1.P$81 | U1.P$83 U1.P$84 | U1.P$80 U1.P$84 | U1.P$84 U1.P$85 | U1.P$86 U1.P$85 | U1.P$90 U1.P$89 | U1.P$89 U1.P$88 U1.P$87 | U1.P$85 U1.P$89
  Bottom 0.152: v24.5,20.9 28.1,20.9 v28.2,20.9 27.6,20.9 26.8,21.7 26.8,25.4 v25.3,26.9 | v38.4,16.7 38.4,15.7 v37.9,15.2 37.9,13.6 v37.8,13.5 | v27.8,13.2 27.8,12 v27.1,11.3
  pour Top: -1.8,36.6 -1.8,2.1 3.7,-3.4 39.3,-3.4 59.1,16.4 59.1,35.9 59,36 55,36
IMU_INT1
  Top 0.152: GND.5 25.93,18.4 26,18.4 27,17.4 27,17.3 27.1,17.2 27,15.7 29.05,13.65 U1.P$N1
IMU_INT2  (via drill 0.3 pad 0.6)
  Top 0.15: GND.6 26.25,18.95 v26.5,19.2 | v29.1,13.1 29.2,13.2 29.6,13.2 29.8,13.4 U1.P$P2
  Bottom 0.15: v29.1,13.1 30.1,14.1 30.1,15.6 v26.5,19.2
LX1
  Top 0.152: L7.1 14.37,28.4 IC9.B3 IC9.B2
LX2
  Top 0.152: L7.2 16.53,28.5 15,28.5 14.6,28.1 14.6,28 14.2,27.6 IC9.D3 IC9.D2
N$1
  Top 0.152: C17.2 29.75,20.95 29.1,20.3 29.1,19.97 X2.1 30.1,18.97 30.1,17.1 30.3,16.9 30.3,16.7 30.39,16.61 30.3,16.05 U1.P$D2
N$2
  Top 0.152: C18.2 21.36,22 24.9,22 25.7,21.2 29,17.5 29,16.6 30.1,15.5 | X2.2 28.7,16.83 28.7,16.3 29.5,15.5 30.1,15.5 | 30.1,15.5 30.2,15.4 U1.P$F2
N$4
  Top 0.152: L3.1 30.7,19.3 L2.2
N$5
  Top 0.152: L2.1 U1.P$B3
N$6  (via drill 0.3 pad 0.6)
  Top 0.15: v37.3,16.3 36.65,15.65 U1.P$E24 | v31.5,19.1 31.95,19.1 C16.1
  Top 0.152: U1.P$E24 37.29,15.65 38.28,15.78 38.8,16.3 40,18.2 40,18.3 40.4,18.5 C15.1 | U1.P$B5 31.2,17.3 31.7,17.8 31.84,17.8 C10.1 C16.1 32.3,19.05 L3.2
  Bottom 0.15: v31.5,19.1 33.3,19.1 36.1,16.3 v37.3,16.3
N$7
  Top 0.152: C13.1 28.66,21.6 36.2,21.6 37.5,20.3 37.5,19.3 36.7,18.5 35.7,18.5 34.45,17.25 U1.P$A18
N$8
  Top 0.152: U1.P$D23 36.3,16.25 36.55,16.25 36.8,16.5 36.8,17.1 37.6,17.9 38.05,17.9 C11.1
N$9
  Top 0.152: U1.P$B24 36.45,17.2 C1.1 37.95,18.9 38.64,19.6 38.64,20.16 36.6,22.2 31.7,22.2 30.9,23 30.9,24.8 30.7,25 30.1,25 X1.1
N$11
  Top 0.152: X1.3 27.75,23.7 C2.1 30.1,23.2 31.4,21.9 36.4,21.9 38.2,20.1 38.2,19.6 37.6,19 37.6,18.8 U1.P$A23
N$12
  Top 0.152: U1.P$N24 39.34,10.75 C9.1
N$13
  Top 0.152: R9.2 18.77,19.77 19.2,20.2 20.5,20.2 IC1.D1
N$14
  Top 0.152: L1.1 38.6,14.05 C3.1 38.05,13.96 37,15 36.05,15 U1.P$H23
N$15  (via drill 0.3 pad 0.6)
  Top 0.15: ANT1.1 5.55,6.6 C4.1 8.35,10.16 v8.2,10.3 | v39.6,15.9 L1.2
  Top 0.152: L1.2 39.6,14.05 C22.1
  Bottom 0.15: v39.6,15.9 42.8,12.7 45.2,12.7 45.5,12.4 45.5,9 44.2,7.7 8.5,7.7 7.6,8.6 7.6,9.7 v8.2,10.3
N$16
  Top 0.15: U1.P$AC5 31.05,11 30.4,11.1 30.3,11 29.7,11 C20.1
N$20
  Top 0.152: GND.7 C19.1 25.86,20.45 24.7,21.6 24.3,21.6 23.9,21.2 23.9,20.6 24.35,20.15 GND.10
N$21
  Top 0.152: R3.2 24.08,15.3 24.45,15.68 24.45,17.82 GND.1
N$22
  Top 0.152: R_TYPE_SEL.2 R1_EP_DR.1 15.36,20.02 SJ1.2
N$23
  Top 0.152: R2.2 13.5,26.3 12.9,26.9 IC9.E1
N$24
  Top 0.152: R2_USB.1 22.8,27.48 22.18,28.09 J3.B5
N$26
  Top 0.152: IC9.D1 12.2,27.6 12,27.4 12,25.9 12.6,25.3 R4.2
N$28  (via drill 0.3 pad 0.6)
  Top 0.152: D5.2 19.95,11 C2-EP-DR.2 | Q3.3 16.9,22.85 16.9,17 18,15.9 20,15.9 20.8,15.1 20.8,11.6 C2-EP-DR.2 | C2-EP-DR.2 20.1,10.9 v20.1,10 | L5.1 43.49,13.01 v44.4,12.1
  Bottom 0.152: v44.4,12.1 44.9,12.1 45.2,11.8 45.2,10 43.3,8.1 22,8.1 v20.1,10
N$29
  Top 0.152: D4.2 21.2,10.75 | 21.2,10.75 21.2,10.9 C2-EP-DR.1 | D2.1 17.45,8.6 20.1,8.6 21.2,9.7 21.2,10.75
N$30
  Top 0.152: C32.2 26.3,12.7 26,12.4 IC2.A2
N$31
  Top 0.152: EPD_C2.2 13.1,22.1 13,22.2 11.8,22.2 11.35,21.75 J1.4
N$32
  Top 0.15: EPD_C1.2 12,20.6 11.35,21.25 J1.5
N$34
  Top 0.152: EPD_C6.2 11.15,14.75 J1.18
N$35
  Top 0.152: EPD_C7.2 13.5,15.7 12.7,15.7 11.6,14.6 11.6,14.5 11.35,14.25 J1.19
N$36
  Top 0.15: EPD_C8.2 10.68,13.7 J1.20
N$37
  Top 0.152: R1_USB.2 24.02,26.82 25.18,27.98 J3.A5
N$38
  Top 0.15: EPD_C10.2 13.2,12.2 13.2,12.6 13.05,12.75 J1.22
N$40
  Top 0.15: J1.24 12.35,11.75 EPD_C12.2
OUT+
  Top 0.15: IC2.A3 27.5,11.9 27.7,11.7 27.7,11 27.8,10.9 29.3,10.9 30.9,9.3 30.9,9.2 31.9,8.2 TP_OP.TP
OUT-
  Top 0.15: IC2.C3 26.7,10.7 27.5,10.7 27.6,10.6 29.2,10.6 30.3,9.5 30.3,8.1 TP_ON.TP
P0.13/1.5D
  Top 0.152: SW_UP.2 32.5,5.12 R5.1 35.14,5.32 C30.2
P0.14/1.5D
  Top 0.152: R8.1 10.81,6.12 C31.2 10.6,5.29 SW_ENT.2
P1.01/1.6C
  Top 0.152: R_RWR_EPD.1 18.05,12.47 DMG2305UX-7.1
P1.02/1.6C
  Top 0.15: R7.1 25.38,6.64 C29.2
  Top 0.152: C29.2 23.91,5.1 22.1,5.1 21.85,4.85 21.85,4.42 SW_DN.2
PMIC_INT  (via drill 0.3 pad 0.6)
  Top 0.15: U1.P$T2 29.7,12.9 29.1,12.3 v28.8,12.3 | IC1.A1 22.3,20.4 22.6,20.4 23,20 23,18.3 24.1,17.2 24.1,15.8 24,15.7 22.9,15.7 21.46,17.14 21.18,17.32 21.1,17.4 v20.8,17.4
  Bottom 0.15: v20.8,17.4 23.4,14.8 27.2,14.8 28,14 28.8,12.4 v28.8,12.3
PREVGH
  Top 0.15: EPD_C9.2 13.75,13.15 10.72,13.15 J1.21
  Top 0.152: D5.1 17.45,5 13.6,5 9.5,9.1 9.5,12.6 10.15,13.25 J1.21
PREVGL
  Top 0.152: J1.23 9.95,12.25 9.8,12.1 9.8,11 11.15,9.65 D2.2 16,10.65 EPD_C11.2
RESE
  Top 0.152: R1_EP_DR.2 14.4,22.6 Q3.2 13.6,22.5 11.7,22.5 11.45,22.25 J1.3
RESET  (via drill 0.3, 0.3 pad 0.6)
  Top 0.15: v34.3,10.1 35.3,9.1 TP_RESET.TP | U1.P$AC13 32.95,10.9 31.9,10.9 v31.7,11.1
  Top 0.152: J2.6 34.51,27.69 33.3,28.9 v33.3,29
  Bottom 0.15: v31.7,11.1 32.1,10.7 33.7,10.7 v34.3,10.1
  Bottom 0.152: v33.3,29 32.9,28.6 32.3,28.6 30.6,26.9 30.6,10.1 32.6,10.1 32.8,10.3 34,10.3 34.2,10.1 v34.3,10.1
SCL/1.4C  (via drill 0.3)
  Top 0.15: IC2.C1 25.1,10.5 25.1,10.1 25.46,9.74 27.24,9.94 27.5,10.2 28.7,10.2 28.8,10.1 29.3,10.1 v29.3,9.5 | v44.4,10.5 44.35,10.45 U3.7
  Bottom 0.15: v44.4,10.5 42.8,8.9 29.8,8.9 29.3,9.4 v29.3,9.5
SCL/2.4C  (via drill 0.3 pad 0.6)
  Top 0.15: R17.2 17.4,24.82 v17.4,24.8 | v27.6,16 28.8,14.8 28.8,14.5 29.3,14 29.7,14 29.8,13.9 U1.P$M2
  Top 0.152: R17.2 15.4,25.62 R4.1 15.98,25.3 18.11,23.57 18.35,23.57 19.9,21.81 20.31,21.4 20.7,21.4 21.5,20.6 21.5,20.1 | IC1.B1 21.5,20.1 | 21.5,20.1 22.1,20.7 22.9,20.7 23.3,20.3 23.3,18.5 23.4,18.4 24.27,18.4 GND.12 24.15,18.45 23.6,19 23.6,21.1 23,21.7 20.4,21.7 19.4,22.7 19.4,25 TP1.TP
  Bottom 0.15: v27.6,16 24.5,16 24.2,16.3 24.2,16.4 17.7,22.6 17.4,22.9 v17.4,24.8
SDA/1.4C  (via drill 0.3 pad 0.6)
  Top 0.15: v41.1,11.9 41.84,11.9 U3.8 | v24.5,10.1 24.5,10.7 24.9,11.1 25.7,11.1 IC2.B2
  Bottom 0.15: v24.5,10.1 26.1,8.5 43.3,8.5 44.9,10.1 44.9,11.1 44.5,11.5 41.5,11.5 v41.1,11.9
SDA/2.4C  (via drill 0.3 pad 0.6)
  Top 0.15: v20.5,20.8 21.1,20.2 IC1.C1
  Top 0.152: R18.2 15.7,26.62 R2.1 16,26.3 16.4,26.7 v16.4,26.8 | TP2.TP 24.4,14 24.85,14.45 GND.2 24.85,17.43 25,17.27 25,16.9 25.5,16.4 v25.5,15.4 | U1.P$L1 29.3,14.8 v29.3,15
  Bottom 0.15: v25.5,15.4 27.9,15.4 28.3,15 v29.3,15
  Bottom 0.152: v29.3,15 29.3,15.1 23.9,20.5 23.9,21.5 23.7,21.7 20.9,21.7 20.5,21.3 v20.5,20.8 20.2,20.8 19.4,21.6 19.4,23.8 v16.4,26.8
SWDCLK  (via drill 0.3)
  Top 0.152: TP_SWDIO.TP 37.6,31.8 31.6,31.8 31.2,31.4 31.2,25.8 31.5,25.5 33.7,25.5 34.05,25.15 J2.2 34.87,24.46 34.6,24.2 34.6,23 v34.8,22.8 | TP_SWDCLK.TP 42.8,29.4 41.5,30.7 36.8,30.7 35.5,29.4 35.5,27.05 J2.4 35.5,25.78 v35.5,25.7 | U1.P$AA24 36.85,11.65 v37.3,12.1 36.45,11.25 U1.P$AC24
  Bottom 0.152: v34.8,22.8 37.41,20.19 37.89,16.09 37.4,15.6 37.2,13.2 37.3,13.1 v37.3,12.1 39,13.8 39,19.8 36.4,22.4 36.4,24.4 36.8,24.8 36.8,25.6 36.7,25.7 v35.5,25.7
SWO
  Top 0.152: U1.P$AD22 36.9,9.2 TP_SWO.TP
VBAT/1.2A
  Top 0.3: TP_VBAT.TP 41.1,7.03 C27.2 39.73,8.82 39.9,9 39.9,9.5 40.3,9.9 40.77,9.9 U3.3 U3.2
VBAT/2.5C
  Top 0.3: C37.2 20.18,19.23 20.5,18.9 20.9,18.9 21.1,19.1 IC1.C2
VBUS/1.5D  (via drill 0.3 pad 0.6)
  Top 0.152: C43.1 21.5,28.62 J3.A9_B4
  Top 0.3: D1.5 25.7,23.9 25.82,24.02 C42.1 | J3.A4_B9 26.33,26.93 25.82,26.43 C42.1 | C42.1 25.73,25.9 v24.9,25.9 | v22.2,27.1 21.9,27.1 C43.1
  Power 0.3: v24.9,25.9 23.4,25.9 v22.2,27.1
VBUS/2.6D  (via drill 0.3 pad 0.6)
  Top 0.3: C21.1 37.1,6.1 v37.1,7 36.33,7 C38.2 | U1.P$AD2 30.6,10.5 30.6,10.1 31.2,9.5 v31.4,9.5 | IC1.A2 22.2,19.6 v22.4,19.4 22.4,17.4 v23.5,16.3
  Power 0.3: v37.1,7 36.6,7.5 33.4,7.5 v31.4,9.5 30.7,10.2 29.2,10.2 23.5,15.9 v23.5,16.3
VREG  (via drill 0.3 pad 0.6)
  Top 0.152: C23.1 19.12,16.9
  Top 0.3: C24.2 IC9.A1 IC9.A2 IC9.A3 14.1,29.2 v14.1,29.9 | 19.12,16.9 19.12,17.12 19.4,17.4 19.6,17.4 C39.1 20.7,18.1 21,18.1 21.5,18.6 IC1.B2 | TP_VREG.TP 18.1,21.3 v18.1,23 | v18.7,17.6 19.12,17.18 C23.1
  Power 0.3: v14.1,29.9 14.1,23 18.8,18.3 18.8,17.7 | 18.8,17.7 v18.7,17.6 | v18.1,23 18.1,19.8 19.2,18.7 19.2,18.1 18.8,17.7
(copper drawn outside any net)
  shapes: Bottom area x1